# Allegro board ROHM_SENSORSHLD1-EVK-101_BRD_REV01_2016-03-24.brd
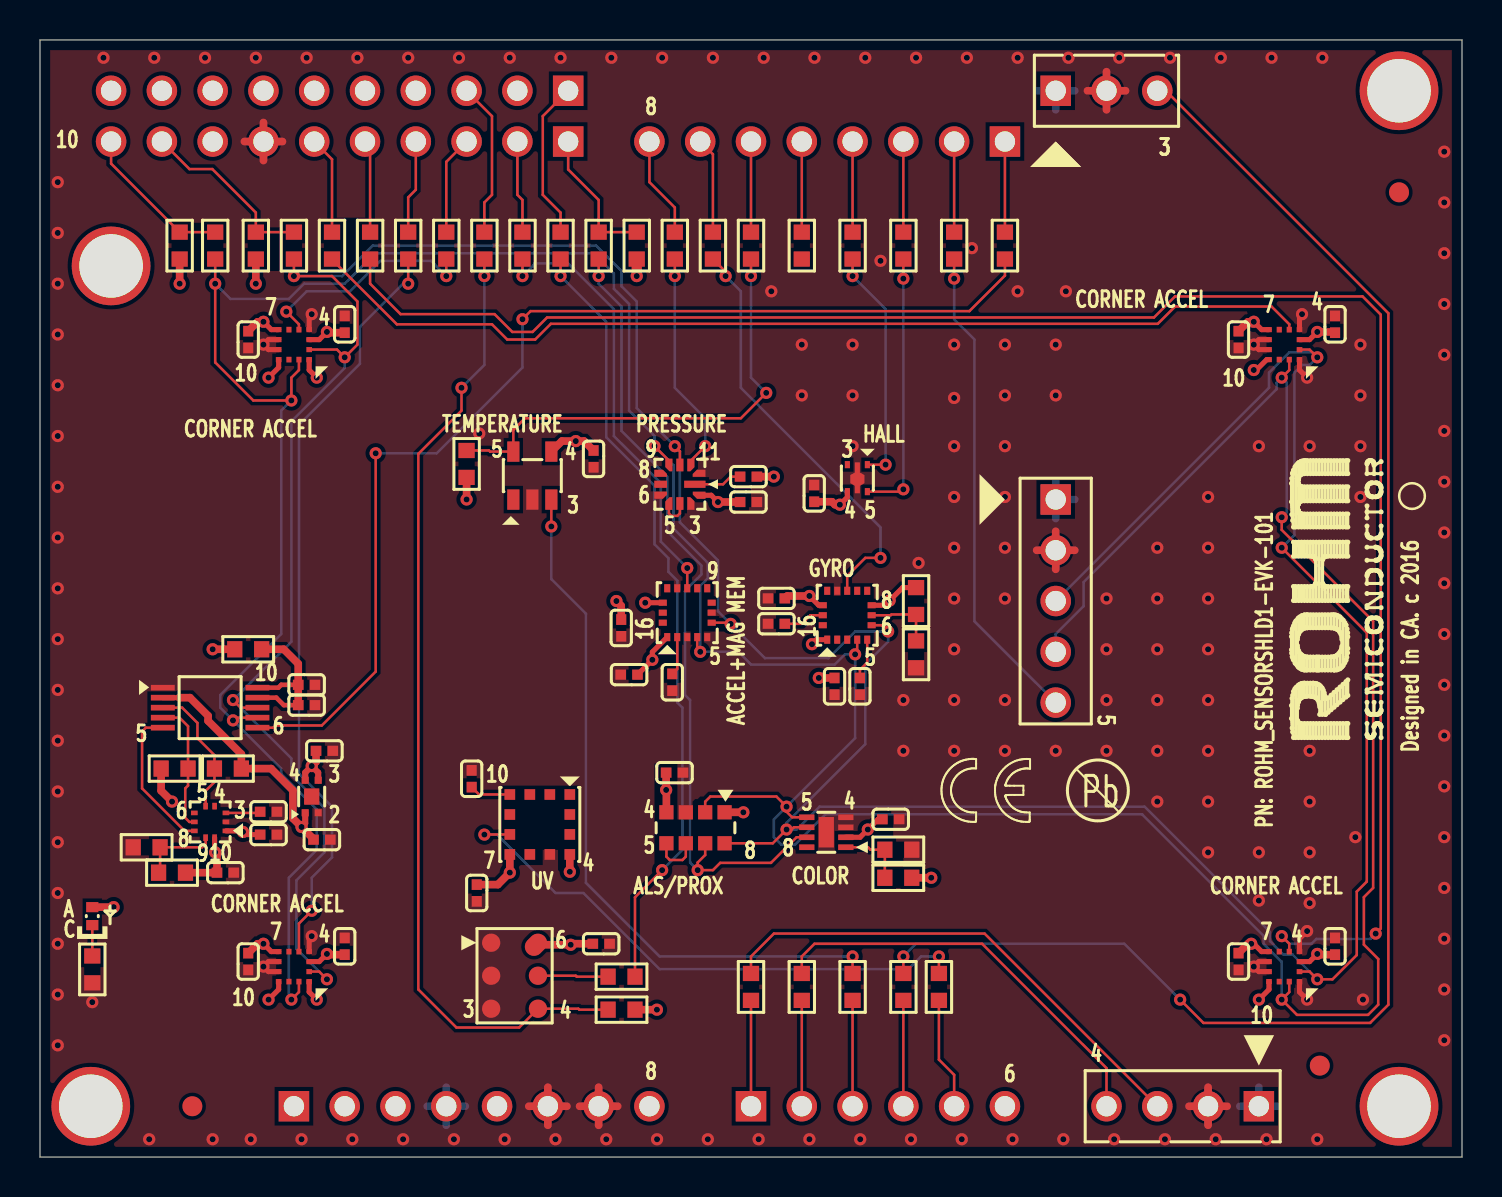
[diagram p0: board, top side]
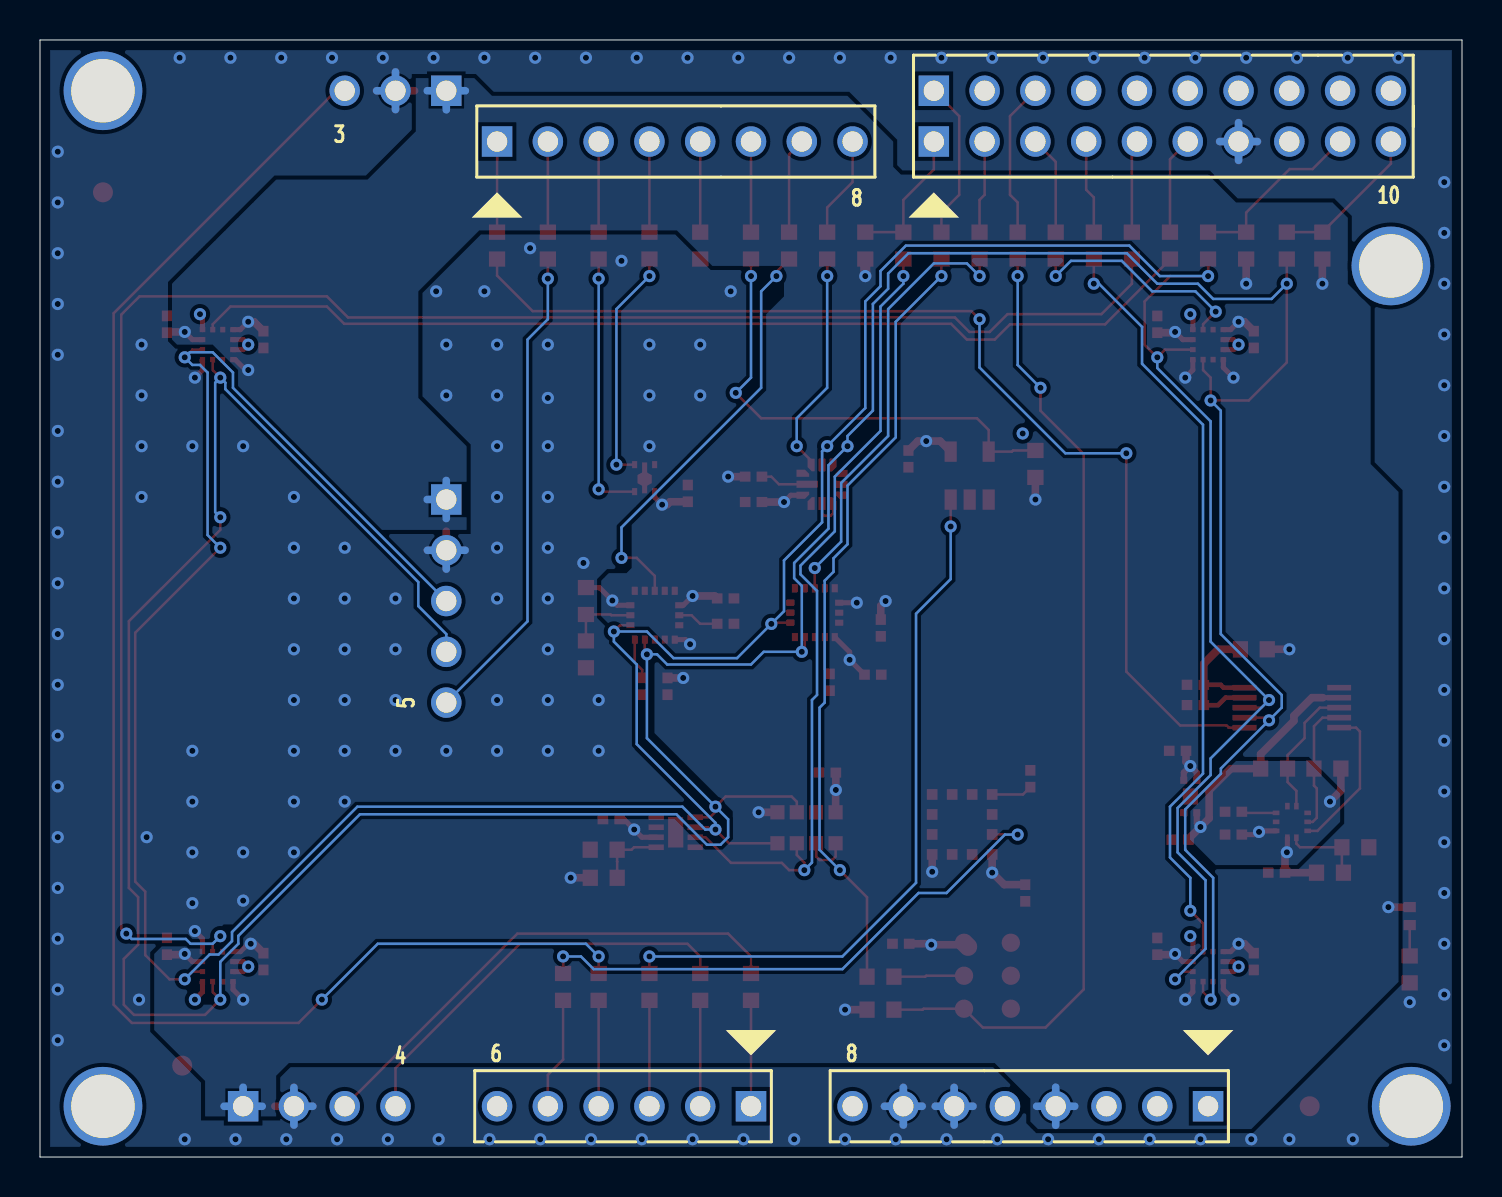
[diagram p1: board, bottom side, seen from below]

Outline 71.12 x 55.88 mm; copper layers: TOP, BOTTOM. Coordinates in mm from the lower left corner of the outline.
Outline path: 0,0 0,55.88 71.12,55.88 71.12,0 0,0

## Placement (name value [footprint] x y rotation side)
C1  0.1uF  [C0402]  27.69 34.92 270 top
C2  0.1uF  [C0402]  35.43 34.04 180 top
C3  0.1uF  [C0402]  35.43 32.77 0 top
C5  0.1uF  [C0402]  38.72 33.2 90 top
C6  0.1uF  [C0402]  21.84 13.21 270 top
C7  1nF  [C0402]  21.59 18.92 90 top
C8  0.47uF  [C0402]  31.74 19.23 0 top
C9  0.1uF  [C0402]  42.55 16.9 0 top
C10  0.1uF  [C0402]  29.46 24.13 180 top
C11  0.1uF  [C0402]  29.07 26.47 270 top
C12  1uF  [C0402]  31.62 23.75 270 top
C17  0.1uF  [C0402]  39.74 23.55 90 top
C19  2.2nF  [C0402]  36.83 26.68 180 top
C21  0.1uF  [C0402]  36.83 27.95 180 top
C22  10nF  [C0402]  41.01 23.55 90 top
C23  0.1uF  [C0402]  28.07 10.67 180 top
C24  0.1uF  [C0402]  15.24 41.66 90 top
C25  0.1uF  [C0402]  10.41 40.89 90 top
C26  0.1uF  [C0402]  15.24 10.54 90 top
C27  0.1uF  [C0402]  10.41 9.78 90 top
C28  0.1uF  [C0402]  64.77 10.54 90 top
C29  0.1uF  [C0402]  59.94 9.78 90 top
C30  0.1uF  [C0402]  64.77 41.66 90 top
C31  0.1uF  [C0402]  59.94 40.89 90 top
C32  1uF  [C0402]  11.43 16.13 180 top
C33  1uF  [C0402]  9.27 14.22 180 top
C34  1uF  [C0402]  11.43 17.27 180 top
C35  1uF  [C0402]  14.22 20.32 180 top
C36  1uF  [C0402]  13.34 23.62 0 top
C37  1uF  [C0402]  14.1 15.88 180 top
C38  1uF  [C0402]  13.34 22.61 180 top
D1  SML-P11VTT86  [LED0402]  2.62 12.05 90 top
H1  BreakoutHeader_5Pin  [HDR_THVT_1X5_100]  50.8 32.89 270 top
H2  BreakoutHeader_4Pin  [HDR_THVT_1X4_100]  60.96 2.54 180 top
H3  BreakoutHeader_3Pin  [HDR_THVT_1X3_100]  50.8 53.34 0 top
H4  Header_Ard_Power  [HDR_THVT_1X8_100]  12.7 2.54 0 bottom
H5  Header_Ard_AnalogIn  [HDR_THVT_1X6_100]  35.56 2.54 0 bottom
H6  Header_Ard_Digital1  [HDR_THVT_1X8_100]  48.26 50.8 180 bottom
H7  Header_Ard_Digital2  [HDR_THVT_1X10_100]  26.42 50.8 180 bottom
H8  Header_Ard_Digital2_TopSide  [HDR_THVT_1X10_100]  26.42 53.34 180 bottom
NOREF  -  [unnamed]  67.97 2.54 0 top
NOREF#2  -  [#2]  27.43 51.56 90 top
NOREF#3  -  [#2]  71.12 0 90 top
NOREF#4  -  [#2]  3.56 53.34 0 top
NOREF#5  -  [#2]  45.72 50.8 0 top
NOREF#6  -  [unnamed#3]  64.01 4.57 90 top
NOREF#7  -  [#2]  -29.69 -36.65 0 top
NOREF#8  -  [unnamed#3]  7.62 2.54 90 top
NOREF#9  -  [#2]  0 55.88 0 top
NOREF#10  -  [unnamed]  2.54 2.54 0 top
NOREF#11  -  [#2]  12.7 2.54 0 top
NOREF#12  -  [unnamed]  67.97 53.34 0 top
NOREF#13  -  [unnamed#3]  67.97 48.26 90 top
NOREF#14  -  [#2]  2.44 51.56 0 top
NOREF#15  -  [#2]  23.88 53.34 0 top
NOREF#16  -  [unnamed]  3.56 44.58 0 top
NOREF#17  -  [#2]  23.88 50.8 0 top
NOREF#18  -  [#2]  3.56 50.8 0 top
NOREF#19  -  [#2]  30.48 50.8 0 top
NOREF#20  -  [#2]  12.7 2.54 0 top
NOREF#21  -  [#2]  -131.17 -237.11 0 top
R1  10k  [R0603]  21.34 34.67 90 top
R8  10k  [R0603]  10.79 45.59 270 top
R9  10k  [R0603]  6.99 45.59 270 top
R10  10k  [R0603]  29.84 45.59 270 top
R11  0  [R0603]  8.76 45.59 270 top
R12  0  [R0603]  12.7 45.59 270 top
R13  0  [R0603]  14.61 45.59 270 top
R14  0  [R0603]  16.51 45.59 270 top
R15  0  [R0603]  18.41 45.59 270 top
R16  0  [R0603]  20.32 45.59 270 top
R17  0  [R0603]  24.13 45.59 270 top
R18  0  [R0603]  27.94 45.59 270 top
R19  0  [R0603]  31.75 45.59 270 top
R20  0  [R0603]  33.66 45.59 270 top
R21  0  [R0603]  35.56 45.59 270 top
R22  0  [R0603]  38.1 45.59 270 top
R23  0  [R0603]  40.64 45.59 270 top
R24  0  [R0603]  43.18 45.59 270 top
R25  0  [R0603]  45.72 45.59 270 top
R26  0  [R0603]  48.26 45.59 270 top
R27  0  [R0603]  35.56 8.51 90 top
R28  0  [R0603]  38.1 8.51 90 top
R29  0  [R0603]  40.64 8.51 90 top
R30  0  [R0603]  43.18 8.51 90 top
R31  0  [R0603]  44.96 8.51 90 top
R33  0  [R0603]  26.04 45.59 90 top
R34  10k  [R0603]  43.81 25.15 90 top
R35  22  [R0603]  29.09 9.02 0 top
R36  10k  [R0603]  2.62 9.38 270 top
R37  10k  [R0603]  42.93 15.37 0 top
R38  10k  [R0603]  29.09 7.37 180 top
R39  0  [R0603]  22.23 45.59 90 top
R40  0  [R0603]  42.93 13.97 180 top
R41  0  [R0603]  43.81 27.81 270 top
R42  200k  [R0603]  10.41 25.4 180 top
R43  10k  [R0603]  9.4 19.43 180 top
R44  0  [R0603]  6.6 14.22 0 top
R45  10k  [R0603]  5.33 15.49 0 top
R46  10k  [R0603]  6.73 19.43 0 top
U1  BDE0600G  [SSOP5]  24.62 34.09 180 top
U2  -  [BM1383GLV]  32 33.66 270 top
U4  BU52014HFV  [HVSOF5]  40.88 33.96 0 top
U5  ML8511  [TQFN12]  25 16.64 180 top
U6  RPR-0521  [IC_3P94X2P36]  32.78 16.47 180 top
U7  -  [BH1745NUC]  39.33 16.25 90 top
U8  KMX62  [LGA_3X3X0P9]  32.37 27.23 0 top
U11  KXG03  [LGA_3X3X0P9]  40.37 27.1 0 top
U12  SPM0423HD4H-WB  [IC_4P72X3P76]  23.74 9.07 0 top
U13  KX122  [LGA_2X2X0P9]  12.7 40.64 180 top
U14  KX122  [LGA_2X2X0P9]  12.7 9.53 180 top
U15  KX122  [LGA_2X2X0P9]  62.23 9.53 180 top
U16  KX122  [LGA_2X2X0P9]  62.23 40.64 180 top
U17  BM1422GMV  [MLLGA010V020A]  8.51 16.76 180 top
U18  NVT2003DP,118  [TSSOP10]  8.51 22.48 0 top
U19  BU18TA2WNVX-TR  [4SSON-EP]  13.59 18.03 90 top

## Library data of the parts
C1-C3 C5-C12 C17 C19 C21-C38 = C_2
D1 = LED_0
H1 = BreakoutHeader_5Pin
H2 = BreakoutHeader_4Pin
H3 = BreakoutHeader_3Pin
H4 = Header_Ard_Power_0
H5 = Header_Ard_AnalogIn
H6 = Header_Ard_Digital1_0
H7 = Header_Ard_Digital2
H8 = Header_Ard_Digital2_TopSide
R1 R8-R31 R33-R46 = R
U1 = HVSOF5_3
U2 = BM1383GLV
U4 = HVSOF5_1
U5 = C-TQFN12-4.0x3.7-1_5.00
U6 = RPR-0521_0
U7 = BH1745NUC_1
U8 = LGA_3.9
U11 = KXG03
U12 = SPM0423HD4H-WB
U13-U16 = KX122
U17 = BM1422GMV
U18 = NVT2003DP,118
U19 = BU18TA2WNVX-TR

## Footprints (pads in the part's own frame, mm; a bottom-side part is the same pattern mirrored in y, then rotated)
4SSON-EP
  rect 0.813x0.762 smd: (0,0)
  rect 0.356x0.356 smd: 1(-0.812,0.325) 2(-0.812,-0.325) 3(0.812,-0.325) 4(0.812,0.325)
BH1745NUC
  rect 0.279x0.762 smd: 1(-0.75,-0.977) 2(-0.25,-0.977) 3(0.25,-0.977) 4(0.75,-0.977) 5(0.75,0.977) 6(0.25,0.977) 7(-0.25,0.977) 8(-0.75,0.977)
  rect 1.524x0.762 smd: 9(0,0)
BM1383GLV
  rect 0.356x1.067 smd: 1(0,0.747)
  custom 0.356x0.635 smd: 2(0.55,0.963) 6(0.55,-0.963) 8(-0.55,-0.963) 12(-0.55,0.963)
  custom 0.635x0.356 smd: 3(0.963,0.55) 5(0.963,-0.55) 9(-0.963,-0.55) 11(-0.963,0.55)
  rect 0.635x0.356 smd: 4(0.963,0) 10(-0.963,0)
  rect 0.356x0.635 smd: 7(0,-0.963)
C0402
  rect 0.533x0.508 smd: 1(-0.419,0) 2(0.419,0)
HDR_THVT_1X3_100
  rect 1.524x1.524 hole 1.016: 1(0,0)
  round 1.524 hole 1.016: 2(2.54,0) 3(5.08,0)
HDR_THVT_1X4_100
  rect 1.524x1.524 hole 1.016: 1(0,0)
  round 1.524 hole 1.016: 2(2.54,0) 3(5.08,0) 4(7.62,0)
HDR_THVT_1X5_100
  rect 1.524x1.524 hole 1.016: 1(0,0)
  round 1.524 hole 1.016: 2(2.54,0) 3(5.08,0) 4(7.62,0) 5(10.16,0)
HDR_THVT_1X6_100
  rect 1.524x1.524 hole 1.016: 1(0,0)
  round 1.524 hole 1.016: 2(2.54,0) 3(5.08,0) 4(7.62,0) 5(10.16,0) 6(12.7,0)
HDR_THVT_1X8_100
  rect 1.524x1.524 hole 1.016: 1(0,0)
  round 1.524 hole 1.016: 2(2.54,0) 3(5.08,0) 4(7.62,0) 5(10.16,0) 6(12.7,0) 7(15.24,0) 8(17.78,0)
HDR_THVT_1X10_100
  rect 1.524x1.524 hole 1.016: 1(0,0)
  round 1.524 hole 1.016: 2(2.54,0) 3(5.08,0) 4(7.62,0) 5(10.16,0) 6(12.7,0) 7(15.24,0) 8(17.78,0) 9(20.32,0) 10(22.86,0)
HVSOF5
  rect 0.254x0.356 smd: 1(0.5,0.675) 3(-0.5,0.675) 4(-0.5,-0.675) 5(0.5,-0.675)
  custom 0.711x1.549 smd: 2(0,0.015)
IC_3P94X2P36
  rect 0.711x0.711 smd: 1(-1.455,-0.775) 2(-0.485,-0.775) 3(0.485,-0.775) 4(1.455,-0.775) 5(1.455,0.775) 6(0.485,0.775) 7(-0.485,0.775) 8(-1.455,0.775)
IC_4P72X3P76
  round 0.914 smd: 1(-1.17,1.65) 2(-1.17,0) 3(-1.17,-1.65) 4(1.17,-1.65) 5(1.17,0)
  oval 1.194x0.914 smd rot 45: 6(1.07,1.55)
LED0402
  rect 0.508x0.61 smd: A(0.45,0) C(-0.45,0)
LGA_2X2X0P9
  rect 0.279x0.254 smd: 1(-0.763,0.75) 2(-0.763,0.25) 3(-0.763,-0.25) 4(-0.763,-0.75) 7(0.763,-0.75) 8(0.763,-0.25) 9(0.763,0.25) 10(0.763,0.75)
  rect 0.254x0.279 smd: 5(-0.25,-0.75) 6(0.25,-0.75) 11(0.25,0.75) 12(-0.25,0.75)
LGA_3X3X0P9
  rect 0.305x0.406 smd: 1(-1,-1.222) 2(-0.5,-1.222) 3(0,-1.222) 4(0.5,-1.222) 5(1,-1.222) 9(1,1.222) 10(0.5,1.222) 11(0,1.222) 12(-0.5,1.222) 13(-1,1.222)
  rect 0.406x0.305 smd: 6(1.222,-0.5) 7(1.222,0) 8(1.222,0.5) 14(-1.222,0.5) 15(-1.222,0) 16(-1.222,-0.5)
MLLGA010V020A
  rect 0.33x0.229 smd: 1(-0.79,0.45) 2(-0.79,0) 3(-0.79,-0.45) 6(0.79,-0.45) 7(0.79,0) 8(0.79,0.45)
  rect 0.229x0.33 smd: 4(-0.225,-0.79) 5(0.225,-0.79) 9(0.225,0.79) 10(-0.225,0.79)
R0603
  rect 0.762x0.813 smd: 1(-0.673,0) 2(0.673,0)
SSOP5
  rect 0.61x1.016 smd: 1(0.95,1.2) 2(0,1.2) 3(-0.95,1.2) 4(-0.95,-1.2) 5(0.95,-1.2)
TQFN12
  rect 0.533x0.533 smd: 1(-1.5,-1.5) 2(-1.5,-0.5) 3(-1.5,0.5) 4(-1.5,1.5) 5(-0.5,1.5) 6(0.5,1.5) 7(1.5,1.5) 8(1.5,0.5) 9(1.5,-0.5) 10(1.5,-1.5) 11(0.5,-1.5) 12(-0.5,-1.5)
TSSOP10
  rect 1.194x0.279 smd: 1(-2.366,1) 2(-2.366,0.5) 3(-2.366,0) 4(-2.366,-0.5) 5(-2.366,-1) 6(2.366,-1) 7(2.366,-0.5) 8(2.366,0) 9(2.366,0.5) 10(2.366,1)
unnamed
  round 3.937 hole 3.175: (0,0)
unnamed#3
  round 1 smd: 1(0,0)

## Nets
1.8V: C32.2 C33.2 C37.2 R43.1 R44.2 R46.1 U17.1(AVDD) U17.10(DVDD) U18.2(VREFA) U19.1(VOUT)
GND: C1.2 C3.2 C5.2 C6.2 C7.2 C8.2 C9.2 C10.2 C11.2 C12.2 C17.1 C19.2 C21.2 C22.1 C23.1 C24.2 C25.1 C26.2 C27.1 C28.2 C29.1 C30.2 C31.1 C32.1 C33.1 C34.1 C35.1 C36.2 C37.1 C38.1 H1.2(GND) H2.2(GND) H3.2(GND) H4.6(GND) H4.7(GND1) H7.7(GND) R34.1 R36.2 R37.2 R45.1 U1.2(GND) U2.3(VSS) U2.6(TEST1) U2.12(TEST0) U4.2(GND) U5.5(GND) U6.3(GND) U7.3(GND) U7.4(TEST) U7.9(TD) U8.3(GND#3) U8.5(GND#5) U8.7(ADDR) U8.12(GND#12) U11.12(VSS) U12.1(GND0) U12.2(SEL) U12.3(GND1) U13.4(TRIG) U13.8(GND0) U13.9(GND1) U14.4(TRIG) U14.8(GND0) U14.9(GND1) U15.1(ADDR) U15.4(TRIG) U15.8(GND0) U15.9(GND1) U16.1(ADDR) U16.4(TRIG) U16.8(GND0) U16.9(GND1) U17.2(GND) U18.1(GND) U19.2(GND)
VDD: C1.1 C2.1 C3.1 C5.1 C6.1 C8.1 C9.1 C10.1 C11.1 C17.2 C21.1 C23.2 C24.1 C25.2 C26.1 C27.2 C28.1 C29.2 C30.1 C31.2 C35.2 D1.A(ANODE) H1.1(VDD) H2.1(VDD) H3.1(VDD) H4.4(3.3V) R1.1 R8.2 R9.2 R10.2 R38.1 R40.1 R41.1 R42.2 U1.4(VDD) U2.2(VDD) U4.4(VDD) U5.4(EN) U5.7(VDD) U6.1(VDD) U6.4(LEDA) U7.2(VCC) U8.1(VDDIO) U8.14(VDD) U11.1(VDDIO) U11.8(CS_B) U11.14(VDD) U12.6(VDD) U13.1(ADDR) U13.3(IO_VDD) U13.7(VDD) U13.10(NCS) U14.1(ADDR) U14.3(IO_VDD) U14.7(VDD) U14.10(NCS) U15.3(IO_VDD) U15.7(VDD) U15.10(NCS) U16.3(IO_VDD) U16.7(VDD) U16.10(NCS) U19.3(STBY) U19.4(VIN)
ADC0: R29.2 U1.3(VTEMP)
ADC1: R31.2 U5.8(OUT)
DMIC_CLK: R38.2 R39.1 U12.4(CLK)
DMIC_DATA: R33.1 R35.2
EXP_ADC1: H2.3(ADC0) R27.2
EXP_ADC2: H2.4(ADC1) R28.2
EXP_ADC3: H3.3(ADC) R30.2
EXP_GPIO1: H1.5(INT) R25.2
GPIO0: R24.2 U4.5(OUT1)
GPIO1: R23.2 U4.1(OUT2)
GPIO2: R22.2
GPIO3: R1.2 R21.2 U1.5(OS)
INT_BM1383: R19.2 U2.11(INT)
INT_KMX62: R17.2 U8.11(INT1)
INT_KX122-1: R16.2 U13.5(INT1)
INT_KX122-2: R14.2 U15.5(INT1)
INT_KX122-3: R15.2 U14.5(INT1)
INT_KX122-4: R13.2 U16.5(INT1)
INT_KXG03: R20.2 U11.11(INT1)
INT_MAG: R26.2 U18.6(B3)
INT_OPTICAL: R18.2 U6.7(INT) U7.7(INT)
SCL: H1.4(SCL) R11.2 U2.9(SCL) U6.2(SCL) U7.5(SCL) U8.4(SCL) U11.4(SCLK_SCL) U13.12(SCL) U14.12(SCL) U15.12(SCL) U16.12(SCL) U18.7(B2)
SDA: H1.3(SDA) R12.2 U2.10(SDA) U6.8(SDA) U7.6(SDA) U8.6(SDA) U11.6(MOSI_SDA) U13.2(SDA) U14.2(SDA) U15.2(SDA) U16.2(SDA) U18.8(B1)
N14002690: C12.1 U8.2(CAP)
N14009218: C7.1 U5.10(TR)
N14013380: U6.5(LEDK) U6.6(LDR)
N14046481: R37.1 R40.2 U7.1(ADDR)
N14046877: U2.4(TIN) U2.5(TOUT)
N14048054: C2.2 U2.1(DREG)
N14098075: H6.8 R19.1
N14098079: H6.7 R20.1
N14098086: H6.6 R21.1
N14098098: H6.5 R22.1
N14098110: H6.4 R23.1
N14098122: H6.3 R24.1
N14098134: H6.2(2/TX) R25.1
N14098146: H6.1(1/RX) R26.1
N14098493: H5.1(A0) R27.1
N14098497: H5.2(A1) R28.1
N14098504: H5.3(A2) R29.1
N14098516: H5.4(A3) R30.1
N14098528: H5.5(A4) R31.1
N14105342: C19.1 U11.15(CPOUT)
N14105886: C22.2 U11.5(VCO_CP)
N14107068: R34.2 R41.2 U11.7(MISO_ADDR)
N14122965: H8.3(DMIC_CLK) R39.2
N14126545: R35.1 U12.5(DATA)
N14207646: C34.2 U17.3(VREG)
N14208918: R46.2 U17.7(SCL) U18.4(A2)
N14209514: U17.8(DRDY) U18.5(A3)
N14210198: R44.1 R45.2 U17.9(ADDR)
N14210289: R43.2 U17.5(SDA) U18.3(A1)
N14216212: C36.1 C38.2 R42.1 U18.9(VREFB) U18.10(EN)
N14227165: H7.1(8) R10.1 R18.1
N14227297: H7.10(SCL) R9.1 R11.1
N14227301: H7.9(SDA) R8.1 R12.1
N14227313: H7.5(12) R14.1
N14227321: H7.4(11) R15.1
N14227333: H7.3(10) R16.1
N14227345: H7.2(9) R17.1
N14227481: H7.6(13) R13.1
N141214550: H8.1(DMIC_DATA) R33.2
N142279790: D1.C(CATHODE) R36.1

Pads without a net: H4 1 2 3 5 8; H5 6; H7 8; H8 2 4 5 6 7 8 9 10; NOREF#6 1; NOREF#8 1; NOREF#13 1; U1 1; U2 7 8; U4 3; U5 1 2 3 6 9 11 12; U7 8; U8 8 9 10 13 15 16; U11 2 3 9 10 13 16; U13 6 11; U14 6 11; U15 6 11; U16 6 11; U17 4 6

## Via types
v1: diameter 0.61, hole 0.305, TOP to BOTTOM, 261 vias

## Routing (per net, layer and track width the routed paths; a pad name or vN(x,y) marks a point on that pad's centre or on a via; arc(x,y) is an arc through that point)
1.8V: length 19.7
  TOP w0.254: U17.1 10.1,16.31 v1(10.15,16.26) 10.29,16.13 C32.2 ; v1(8.76,15.24) 8.73,15.27 U17.10 ; 6.96,22.98 U18.2
  TOP w0.305: U19.1 13.26,16.69 v1(13.08,16.51)
  TOP w0.381: 6.96,22.98 7.5,22.98 8.41,22.07 8.41,21.82 10.07,20.15 R43.1 11.56,19.43 12.65,18.34 12.65,16.94 v1(13.08,16.51) 13.68,15.91 C37.2 ; R46.1 6.06,18.33 v1(6.6,17.78) ; R44.2 C33.2 8.85,15.15 v1(8.76,15.24)
GND: length 55.3
  TOP w0.254: U15.9 60.96,9.27 v1(60.71,9.53) 60.96,9.78 U15.8 ; v1(63.12,42.16) 62.99,42.04 U16.4 ; U15.1 62.99,8.25 v1(63.37,7.87) ; U13.4 13.46,42.04 v1(13.59,42.16) ; U13.8 11.43,40.89 v1(11.18,40.64) 11.43,40.39 U13.9 ; v1(13.59,11.05) 13.46,10.92 U14.4 ; U16.9 60.96,40.39 v1(60.71,40.64) 60.96,40.89 U16.8 ; v1(63.37,11.3) 62.99,10.92 U15.4 ; U14.8 11.43,9.78 v1(11.18,9.53) 11.43,9.27 U14.9 ; U16.1 62.99,39.37 v1(63.37,38.99)
  TOP w0.381: H7.7 12.13,50.8 ; H7.7 11.18,49.85 ; H7.7 11.18,51.75 ; H7.7 10.22,50.8 ; H3.2 53.34,54.29 ; H3.2 53.34,52.39 ; H3.2 52.39,53.34 ; H3.2 54.29,53.34 ; H1.2 50.8,31.31 ; H1.2 49.85,30.35 ; H1.2 50.8,29.4 ; H1.2 51.75,30.35 ; 25.4,1.59 H4.6 ; H4.6 26.35,2.54 ; H4.6 25.4,3.49 ; H4.6 24.45,2.54 ; 57.47,2.54 H2.2 ; H2.2 58.42,1.59 ; H2.2 59.37,2.54 ; H2.2 58.42,3.49 ; 27.94,1.59 H4.7 ; H4.7 26.99,2.54 ; H4.7 28.89,2.54 ; H4.7 27.94,3.49
  BOTTOM w0.381: 27.94,1.6 H4.7 ; H4.7 27,2.54 ; H4.7 27.94,3.48 ; H4.7 28.88,2.54 ; 58.42,1.6 H2.2 ; H2.2 58.42,3.48 ; H2.2 57.48,2.54 ; 53.34,52.4 H3.2 ; H3.2 53.34,54.28 ; H3.2 54.28,53.34 ; H1.2 51.74,30.35 ; H1.2 49.86,30.35 ; H1.2 50.8,29.41 ; H4.6 26.34,2.54 ; H4.6 24.46,2.54 ; H4.6 25.4,1.6 ; H4.6 25.4,3.48 ; 10.24,50.8 H7.7 ; H7.7 12.12,50.8 ; H7.7 11.18,51.74 ; H7.7 11.18,49.86
  vias: v1(0.89,48.77) v1(0.89,46.23) v1(0.89,43.69) v1(0.89,41.15) v1(0.89,38.61) v1(0.89,36.07) v1(0.89,33.53) v1(0.89,30.99) v1(0.89,28.45) v1(0.89,25.91) v1(0.89,23.37) v1(0.89,20.83) v1(0.89,18.29) v1(0.89,15.75) v1(0.89,13.21) v1(0.89,10.67) v1(0.89,8.13) v1(0.89,5.59) v1(2.62,7.75) v1(3.17,54.99) v1(5.46,0.89) v1(5.71,54.99) v1(8.26,54.99) v1(8.64,0.89) v1(10.54,0.89) v1(10.79,54.99) v1(13.08,0.89) v1(13.34,54.99) v1(15.62,0.89) v1(15.88,54.99) v1(18.16,0.89) v1(18.41,54.99) v1(20.7,0.89) v1(20.95,54.99) v1(21.97,36.2) v1(23.24,0.89) v1(23.5,54.99) v1(25.78,0.89) v1(26.04,54.99) v1(28.32,0.89) v1(28.57,54.99) v1(30.86,0.89) v1(31.11,54.99) v1(33.4,0.89) v1(33.66,54.99) v1(35.94,0.89) v1(36.2,54.99) v1(36.58,43.31) v1(38.1,40.64) v1(38.1,38.1) v1(38.48,0.89) v1(38.73,54.99) v1(40.64,40.64) v1(40.64,38.1) v1(40.64,35.56) v1(41.02,0.89) v1(41.27,54.99) v1(42.04,44.83) v1(43.18,22.86) v1(43.18,20.32) v1(43.56,0.89) v1(43.81,54.99) v1(43.94,29.72) v1(45.72,40.64) v1(45.72,37.97) v1(45.72,35.56) v1(45.72,33.02) v1(45.72,30.48) v1(45.72,27.94) v1(45.72,25.4) v1(45.72,22.86) v1(45.72,20.32) v1(46.1,0.89) v1(46.35,54.99) v1(46.61,45.47) v1(48.26,40.64) v1(48.26,38.1) v1(48.26,35.56) v1(48.26,33.02) v1(48.26,30.48) v1(48.26,27.94) v1(48.26,22.86) v1(48.26,20.32) v1(48.64,0.89) v1(48.9,54.99) v1(48.9,43.31) v1(50.8,40.64) v1(50.8,38.1) v1(50.8,20.32) v1(51.18,0.89) v1(51.31,43.31) v1(51.44,54.99) v1(53.34,27.94) v1(53.34,25.4) v1(53.34,22.86) v1(53.34,20.32) v1(53.72,0.89) v1(53.98,54.99) v1(55.88,30.48) v1(55.88,27.94) v1(55.88,25.4) v1(55.88,22.86) v1(55.88,20.32) v1(55.88,17.78) v1(56.26,0.89) v1(56.52,54.99) v1(58.42,33.02) v1(58.42,30.48) v1(58.42,27.94) v1(58.42,25.4) v1(58.42,22.86) v1(58.42,20.32) v1(58.42,17.78) v1(58.42,15.24) v1(58.8,0.89) v1(59.05,54.99) v1(60.96,35.56) v1(60.96,15.24) v1(60.96,12.83) v1(61.34,0.89) v1(61.59,54.99) v1(63.5,35.56) v1(63.5,20.32) v1(63.5,17.78) v1(63.5,15.24) v1(63.5,12.7) v1(63.88,0.89) v1(64.14,54.99) v1(65.79,16) v1(66.04,40.64) v1(66.04,38.1) v1(66.04,35.56) v1(66.04,33.02) v1(66.17,7.87) v1(70.23,50.29) v1(70.23,47.75) v1(70.23,45.21) v1(70.23,42.67) v1(70.23,40.13) v1(70.23,36.32) v1(70.23,33.78) v1(70.23,31.24) v1(70.23,28.7) v1(70.23,26.16) v1(70.23,23.62) v1(70.23,21.08) v1(70.23,18.54) v1(70.23,16) v1(70.23,13.46) v1(70.23,10.92) v1(70.23,8.38) v1(70.23,5.84)
VDD: length 75.5
  TOP w0.254: v1(38.48,28.07) 38.95,27.6 U11.14 ; C10.1 v1(30.63,24.87) 30.63,25.26 U8.1 ; U16.3 63.5,40.89 v1(63.88,41.27) ; U13.10 11.94,39.5 v1(11.43,38.99) ; U14.10 11.94,8.38 v1(11.43,7.87) ; U13.7 11.57,41.39 v1(11.18,41.78) ; U14.1 13.46,8.25 v1(13.84,7.87) ; v1(14.35,10.16) 13.97,9.78 U14.3 ; v1(60.71,41.78) 61.1,41.39 U16.7 ; v1(38.61,25.65) 38.83,25.88 U11.1 ; v1(63.88,10.16) 63.5,9.78 U15.3 ; v1(60.58,10.67) 60.71,10.67 61.1,10.28 U15.7 ; U14.7 11.57,10.28 v1(11.18,10.67) ; R41.1 43.14,28.49 v1(42.49,27.84) 42.26,27.6 U11.8 ; U2.2 33.57,33.1 v1(33.91,32.77) ; v1(13.84,38.99) 13.46,39.37 U13.1 ; U4.4 40.38,33.01 v1(40.01,32.63) ; v1(60.96,7.87) 61.47,8.38 U15.10 ; U8.14 v1(30.27,27.73) ; v1(14.35,41.27) 13.97,40.89 U13.3 ; v1(60.71,39.37) 60.83,39.37 61.35,39.89 U16.10 ; C9.1 41.92,16.9 v1(41.4,16.38) 41.01,16 U7.2
  TOP w0.305: U19.3 13.91,19.23 v1(13.59,19.56) 13.26,19.23 U19.4
  TOP w0.381: C6.1 22.9,13.63 v1(23.5,14.23) U5.7 ; v1(60.71,41.78) 60.41,41.78 C31.2 ; C2.1 v1(36.7,34.04) ; v1(40.01,32.63) 39.76,32.63 39.61,32.78 C5.1 ; v1(63.88,41.27) 64.73,41.27 C30.1 ; C28.1 63.92,10.12 v1(63.88,10.16) ; C26.1 14.39,10.12 v1(14.35,10.16) ; R1.1 v1(21.34,32.89) ; C21.1 37.37,28.07 v1(38.48,28.07) ; C35.2 13.8,19.77 v1(13.59,19.56) ; R38.1 v1(30.86,7.37) ; U12.6 v1(26.54,10.62) 26.6,10.67 C23.2 ; R8.2 v1(10.79,43.69) ; C17.2 v1(38.95,23.97) ; R42.2 v1(8.64,25.4) ; R40.1 v1(44.58,13.97) ; C3.1 v1(33.91,32.77) ; v1(11.18,10.67) 10.88,10.67 C27.2 ; R9.2 v1(6.99,43.69) ; v1(11.18,41.78) 10.88,41.78 C25.2 ; C1.1 27.22,35.81 v1(26.8,35.81) 26.1,35.81 U1.4 ; C24.1 14.39,41.24 v1(14.35,41.27) ; D1.A v1(3.68,12.5) ; v1(60.58,10.67) 60.41,10.67 C29.2 ; v1(28.83,27.81) 29.07,27.57 C11.1 ; C8.1 v1(31.32,18.36) 31.33,18.35 U6.4 ; U5.4 v1(26.5,14.27) ; U6.1 v1(35.18,17.24)
  TOP w0.508: v1(29.84,44.07) R10.2
  BOTTOM w0.381: H2.1 61.91,2.54 ; H2.1 60.01,2.54 ; H2.1 60.96,3.49 ; 50.8,31.94 H1.1 ; H1.1 51.75,32.89 ; H1.1 50.8,33.85 ; 19.37,2.54 H4.4 ; H4.4 20.32,1.59 ; H4.4 21.27,2.54 ; H4.4 20.32,3.49 ; H3.1 51.75,53.34 ; H3.1 50.8,52.39 ; H3.1 49.85,53.34
ADC0: length 35.6
  TOP w0.127: R29.2 v1(40.64,10.03) ; U1.3 v1(25.57,31.54)
  BOTTOM w0.127: v1(25.57,31.54) 25.57,28.91 27.3,27.18 27.3,13.72 30.99,10.03 v1(40.64,10.03)
ADC1: length 27.9
  TOP w0.127: v1(22.23,16.13) 22.23,16.14 U5.8 ; R31.2 v1(44.96,10.03)
  BOTTOM w0.127: v1(44.96,10.03) 44.06,10.03 43.43,9.4 30.99,9.4 27.18,13.21 25.78,13.21 22.86,16.13 v1(22.23,16.13)
DMIC_CLK: length 48.6
  TOP w0.127: v1(21.08,38.48) 21.08,37.34 18.92,35.18 18.92,8.38 20.83,6.48 23.96,6.48 U12.4 26.92,7.42 26.97,7.37 R38.2 ; R39.1 v1(22.23,44.07)
  BOTTOM w0.127: v1(22.23,44.07) 22.23,39.62 v1(21.08,38.48)
DMIC_DATA: length 39.4
  TOP w0.127: R33.1 v1(26.04,44.07) ; R35.2 29.76,12.99 v1(31.11,14.35)
  BOTTOM w0.127: v1(31.11,14.35) 32.13,15.37 32.13,22.48 31.88,22.73 31.88,28.83 31.43,29.27 31.43,29.95 30.73,30.65 30.73,33.59 28.32,36 28.32,41.78 v1(26.04,44.07)
EXP_ADC1: length 25.2
  TOP w0.127: H2.3 47.24,11.18 36.7,11.18 35.56,10.03 R27.2
EXP_ADC2: length 20.8
  TOP w0.127: R28.2 38.1,10.03 38.73,10.67 47.12,10.67 53.34,4.45 H2.4
EXP_ADC3: length 78.1
  TOP w0.127: R30.2 v1(43.18,10.03) ; H3.3 56.31,53.34 67.44,42.21 67.44,7.62 66.53,6.71 58.19,6.71 v1(57.02,7.87)
  BOTTOM w0.127: v1(43.18,10.03) 43.81,10.67 54.23,10.67 v1(57.02,7.87)
EXP_GPIO1: length 24.3
  TOP w0.127: R25.2 v1(45.72,43.94)
  BOTTOM w0.127: H1.5 46.74,26.8 46.74,40.89 45.72,41.91 v1(45.72,43.94)
GPIO0: length 13.4
  TOP w0.127: v1(43.18,33.4) 43.18,33.41 43.05,33.29 U4.5 ; R24.2 v1(43.18,43.94)
  BOTTOM w0.127: v1(43.18,43.94) v1(43.18,33.4)
GPIO1: length 11.9
  TOP w0.127: U4.1 v1(42.29,34.64) ; R23.2 v1(40.64,44.07)
  BOTTOM w0.127: v1(40.64,44.07) 42.29,42.42 v1(42.29,34.64)
GPIO3: length 23.9
  TOP w0.127: R21.2 v1(35.56,44.07) ; R1.2 22.46,35.34 22.51,35.29 U1.5 23.67,36.37 24.26,36.96 35.05,36.96 v1(36.32,38.23)
  BOTTOM w0.127: v1(36.32,38.23) 35.56,38.99 v1(35.56,44.07)
INT_BM1383: length 11.2
  TOP w0.127: R19.2 v1(31.75,44.07) ; v1(33.27,35.56) 32.55,34.84 U2.11
  BOTTOM w0.127: v1(31.75,44.07) 31.75,38.48 33.27,36.96 v1(33.27,35.56)
INT_KMX62: length 22.1
  TOP w0.127: U8.11 v1(32.37,29.46) ; R17.2 v1(24.13,44.07)
  BOTTOM w0.127: v1(24.13,44.07) 24.77,44.7 26.42,44.7 28.7,42.42 28.7,36.07 31.05,33.72 31.05,30.78 v1(32.37,29.46)
INT_KX122-1: length 11.4
  TOP w0.127: v1(12.32,42.29) 12.95,41.66 U13.5 ; R16.2 v1(20.32,44.07)
  BOTTOM w0.127: v1(12.32,42.29) 13.34,43.31 15.49,43.31 17.02,44.83 19.56,44.83 v1(20.32,44.07)
INT_KX122-2: length 91
  TOP w0.127: v1(62.1,11.05) 62.48,10.67 U15.5 ; v1(66.8,11.18) 67.06,11.43 67.06,42.14 66.14,43.05 56.77,43.05 55.71,42 25.36,42 24.64,41.27 23.62,41.27 22.73,42.16 18.03,42.16 16.51,43.69 R14.2
  BOTTOM w0.127: v1(66.8,11.18) 66.53,10.91 63.83,10.91 63.59,10.67 62.48,10.67 v1(62.1,11.05)
INT_KX122-3: length 38.4
  TOP w0.127: U14.5 12.95,11.68 v1(13.59,12.32) ; R15.2 v1(18.41,43.69)
  BOTTOM w0.127: v1(18.41,43.69) 18.16,43.69 16,41.53 16,39.68 12.95,36.63 12.95,19.18 14.61,17.53 14.61,14.99 13.59,13.97 v1(13.59,12.32)
INT_KX122-4: length 50.9
  TOP w0.127: U16.5 62.48,41.66 61.59,42.55 56.77,42.55 55.91,41.68 25.55,41.68 24.77,40.89 23.37,40.89 22.61,41.66 17.85,41.66 14.61,44.9 R13.2
INT_KXG03: length 21.2
  TOP w0.127: U11.11 40.37,29.07 41.27,29.97 v1(42.04,29.97) ; R20.2 34.29,44.28 v1(34.29,44.07)
  BOTTOM w0.127: v1(42.04,29.97) 42.04,31.5 35.05,38.48 35.05,43.31 v1(34.29,44.07)
INT_MAG: length 55.4
  TOP w0.127: U18.6 11.67,21.48 11.78,21.59 14.1,21.59 16.79,24.28 v1(16.79,35.2) ; v1(24.13,41.91) 24.54,42.32 46.48,42.32 48.26,44.09 R26.2
  BOTTOM w0.127: v1(24.13,41.91) 24.13,39.5 19.84,35.2 v1(16.79,35.2)
INT_OPTICAL: length 40.9
  TOP w0.127: R18.2 v1(27.94,44.07) ; U6.7 33.27,15.11 32.89,14.73 v1(32.89,14.35) 33.66,14.35 34.02,14.72 36.56,14.72 37.84,16 U7.7
  BOTTOM w0.127: v1(27.94,44.07) 27.94,43.69 29.08,42.55 29.08,36.32 31.37,34.04 31.37,31.3 33.08,29.59 33.08,29.15 32.26,28.32 32.26,23.11 32.51,22.86 32.51,14.73 v1(32.89,14.35)
SCL: length 210.4
  TOP w0.127: v1(9.65,21.84) 9.79,21.98 U18.7 ; U14.12 12.95,8.25 v1(12.57,7.87) ; v1(62.1,32) 62.1,31.37 66.67,26.8 66.67,13.46 66.21,13 66.21,10.62 66.93,9.91 66.93,7.62 66.42,7.11 62.87,7.11 v1(62.1,7.87) 62.48,8.25 U15.12 ; U13.12 12.95,39.37 12.57,38.99 v1(12.57,37.85) 10.67,37.85 8.76,39.75 v1(8.76,43.69) R11.2 ; U2.9 31.45,34.84 v1(30.73,35.56) ; v1(40.77,25.15) 40.87,25.25 U11.4 ; U16.12 62.48,39.37 v1(62.1,38.99) ; U6.2 33.27,17.77 33.53,18.03 36.83,18.03 v1(37.34,17.53) 37.34,17.27 37.61,17 U7.5 ; v1(33.02,25.27) 32.87,25.42 U8.4
  BOTTOM w0.127: H1.4 50.8,26.16 52.2,27.56 52.2,28.76 61.85,38.41 61.85,38.73 v1(62.1,38.99) 62.36,38.73 62.36,32.26 v1(62.1,32) ; v1(12.57,37.85) 12.06,37.34 12.06,26.16 9.02,23.11 9.02,22.48 v1(9.65,21.84) 12.06,19.44 12.06,19.17 13.84,17.39 13.84,15.37 12.45,13.97 12.45,8 v1(12.57,7.87) ; v1(8.76,43.69) 9.53,42.93 12.45,42.93 13.21,43.69 15.24,43.69 16.76,45.21 27.69,45.21 28.7,44.2 28.7,43.43 29.46,42.67 29.46,37.34 30.73,36.07 v1(30.73,35.56) 31.69,34.61 31.69,31.43 33.4,29.72 33.4,28.96 33.02,28.57 v1(33.02,25.27) 34.92,25.27 35.56,24.64 39.75,24.64 40.26,25.15 v1(40.77,25.15) 40.77,20.95 v1(37.34,17.53) 36.7,16.89 36.7,16 37.08,15.62 37.77,15.62 39.29,17.14 55.12,17.14 61.2,11.06 61.2,10.67 62.1,9.77 v1(62.1,7.87)
SDA: length 201.6
  TOP w0.127: R12.2 v1(12.7,44.07) 14.61,44.07 15.88,42.8 15.88,40.64 v1(15.24,40.01) 14.86,40.39 U13.2 ; v1(31.75,35.56) 32,35.31 U2.10 ; v1(14.35,8.89) 13.97,9.27 U14.2 ; U15.2 63.5,9.27 63.5,9.27 v1(63.88,8.89) 64.64,8.89 65.86,10.1 65.86,13.28 66.36,13.78 66.36,26.23 v1(62.1,30.48) ; U8.6 34.48,26.73 v1(34.54,26.67) ; U7.6 37.7,16.5 37.59,16.38 v1(37.34,16.38) 36.65,15.69 U6.8 ; U16.2 63.5,40.39 v1(63.88,40.01) ; U18.8 10.03,22.48 v1(9.65,22.86) ; v1(42.42,26.29) 42.1,26.6 U11.6
  BOTTOM w0.127: v1(12.7,44.07) 15.11,44.07 16.64,45.59 27.81,45.59 29.08,44.32 29.08,43.56 29.84,42.8 29.84,37.47 v1(31.75,35.56) 32,35.31 32,31.75 33.91,29.84 33.91,27.3 v1(34.54,26.67) 36.26,24.96 39.43,24.96 40.77,26.29 v1(42.42,26.29) 42.42,25.78 41.27,24.64 41.27,20.65 37.34,16.72 v1(37.34,16.38) 37.85,16.38 38.99,17.53 55.24,17.53 61.52,11.25 61.52,10.8 62.19,10.13 62.64,10.13 v1(63.88,8.89) ; v1(14.35,8.89) 12.83,10.41 12.83,13.84 14.22,15.24 14.22,17.46 12.57,19.11 12.57,19.94 v1(9.65,22.86) 12.57,25.78 12.57,36.8 15.24,39.47 v1(15.24,40.01) ; v1(62.1,30.48) 62.74,31.11 62.74,39.24 63.12,39.62 63.5,39.62 v1(63.88,40.01) 63.63,40.26 62.48,40.26 61.47,39.24 61.47,38.48 50.8,27.81
N14002690: length 1.9
  TOP w0.127: C12.1 31.87,24.42 U8.2
N14009218: length 2.1
  TOP w0.127: C7.1 21.96,18.14 U5.10
N14013380: length 2.4
  TOP w0.127: U6.6 32.3,15.03 32.13,14.86 31.5,14.86 31.33,15.03 U6.5
N14046481: length 3.4
  TOP w0.127: R40.2 42.25,14.77 42.25,14.78 R37.1 41.53,15.37 41.41,15.5 U7.1
N14046877: length 1.6
  TOP w0.127: U2.5 31.45,32.2 31.58,32.07 31.88,32.07 32,32.2 U2.4
N14048054: length 2.4
  TOP w0.127: C2.2 34.54,34.04 34.16,33.66 U2.1
N14098075: length 5.1
  TOP w0.127: H6.8 30.48,48.77 31.75,47.5 R19.1
N14098079: length 4.8
  TOP w0.127: R20.1 33.66,50.16 H6.7
N14098086: length 4.5
  TOP w0.127: R21.1 H6.6
N14098098: length 4.5
  TOP w0.127: R22.1 H6.5
N14098110: length 4.5
  TOP w0.127: R23.1 H6.4
N14098122: length 4.5
  TOP w0.127: R24.1 H6.3
N14098134: length 4.5
  TOP w0.127: R25.1 H6.2
N14098146: length 4.5
  TOP w0.127: R26.1 H6.1
N14098493: length 5.3
  TOP w0.127: R27.1 H5.1
N14098497: length 5.3
  TOP w0.127: R28.1 H5.2
N14098504: length 5.3
  TOP w0.127: R29.1 H5.3
N14098516: length 5.3
  TOP w0.127: R30.1 H5.4
N14098528: length 5.6
  TOP w0.127: H5.5 45.72,4.11 44.96,4.87 R31.1
N14105342: length 2.1
  TOP w0.127: U11.15 38.53,27.1 38.11,26.68 C19.1
N14105886: length 2.1
  TOP w0.127: C22.2 41.01,24.37 41.37,24.74 U11.5
N14107068: length 3.6
  TOP w0.127: R34.2 R41.2 42.58,27.14 42.55,27.1 U11.7
N14122965: length 7.8
  TOP w0.127: R39.2 22.23,47.75 22.61,48.13 22.61,52.07 H8.3
N14126545: length 3.5
  TOP w0.127: R35.1 26.84,9.02 26.8,9.07 U12.5
N14207646: length 1.7
  TOP w0.127: U17.3 10.95,17.21 C34.2
N14208918: length 6.6
  TOP w0.127: U17.7 7.47,16.76 7.26,16.97 7.26,18.44 7.4,18.58 R46.2 7.4,21.55 6.98,21.98 U18.4
N14209514: length 7.5
  TOP w0.127: U17.8 7.23,16.31 5.11,18.44 5.11,21.29 5.3,21.48 U18.5
N14210198: length 4
  TOP w0.127: R44.1 6.01,14.3 R45.2 8.1,15.49 8.28,15.68 U17.9
N14210289: length 6.7
  TOP w0.127: U17.5 8.28,18.32 8.72,18.76 R43.2 8.72,20.1 7.87,20.95 7.87,21.72 7.11,22.48 U18.3
N14216212: length 8.5
  TOP w0.229: C36.1 12.06,23.62 11.92,23.48 U18.10 ; C38.2 12.19,22.61 11.82,22.98 U18.9
  TOP w0.381: R42.1 12.19,25.4 12.92,24.68 C36.1 C38.2
N14227165: length 7.1
  TOP w0.127: H7.1 26.42,49.4 27.94,47.88 R18.1 R10.1
N14227297: length 7.7
  TOP w0.127: R11.1 R9.1 3.56,49.7 H7.10
N14227301: length 9.1
  TOP w0.127: R12.1 R8.1 10.79,47.24 8.62,49.42 7.47,49.42 H7.9
N14227313: length 4.6
  TOP w0.127: R14.1 16.51,50.55 H7.5
N14227321: length 4.7
  TOP w0.127: H7.4 18.8,48.39 18.41,48.01 R15.1
N14227333: length 5
  TOP w0.127: H7.3 20.32,49.78 R16.1
N14227345: length 4.6
  TOP w0.127: R17.1 24.13,47.88 23.88,48.13 H7.2
N14227481: length 4.9
  TOP w0.127: H7.6 14.61,49.91 R13.1
N141214550: length 8
  TOP w0.127: R33.2 26.04,47.24 25.15,48.13 25.15,52.07 H8.1
N142279790: length 1.5
  TOP w0.127: R36.1 D1.C

## Copper pours and planes (outline as drawn; the poured copper is in the pictures)
1.8V on BOTTOM: 8.26,14.61 12.32,14.61 13.59,15.88 13.59,17.53 11.3,19.81 7.75,19.81 6.1,18.16 6.1,16.76
GND on TOP: 0.51,55.37 70.61,55.37 70.61,0.51 0.51,0.51 ; 19 cut-outs
GND on BOTTOM: 0.51,55.37 70.61,55.37 70.61,0.51 0.51,0.51 ; 4 cut-outs
VDD on BOTTOM: 10.54,1.4 3.17,8.76 3.17,33.27 4.57,34.67 4.57,42.55 5.71,43.69 5.71,46.99 6.48,47.75 11.3,47.75 12.7,49.15 28.07,49.15 28.45,49.53 28.45,50.8 30.73,53.09 48.51,53.09 49.4,53.98 52.32,53.98 52.32,51.31 54.74,48.9 59.31,48.9 64.52,43.69 64.52,40.89 64.26,40.64 62.48,40.64 61.21,39.37 61.21,38.48 54.1,31.37 49.78,31.37 49.78,35.56 52.2,37.97 52.2,43.31 49.15,46.35 39.27,46.35 37.49,44.58 34.04,44.58 33.91,44.45 33.91,43.05 34.8,42.16 34.8,38.35 41.53,31.62 41.53,29.46 41.78,29.21 42.67,29.21 43.05,28.83 43.05,27.05 42.42,26.42 41.27,26.42 40.39,25.53 40.39,21.21 36.47,17.3 36.47,16.48 37.08,15.88 37.47,15.88 38.73,17.14 55.12,17.14 60.83,11.43 61.85,11.43 62.36,10.92 62.36,7.62 62.99,7.62 62.99,10.54 65.02,10.54 65.41,10.16 65.41,6.35 62.87,3.81 62.87,2.03 59.31,2.03 59.31,4.06 58.67,4.7 23.37,4.7 21.59,2.92 21.59,1.78 21.21,1.4 ; 2 cut-outs

## Text on the board
Ref Des/Silkscreen Bottom: 10
Ref Des/Silkscreen Top: CORNER ACCEL | TEMPERATURE | UV | ALS/PROX | PRESSURE | COLOR | GYRO | HALL | ACCEL+MAG MEM | PN: ROHM_SENSORSHLD1-EVK-101 | Designed in CA. c 2016 | Pb
LOGO_OUTLINE_M: SHEET:
User.7: 2 OF 2 | ASSEMBLY | SECONDARY-SIDE
User.9: 14. Rounding is allowed on 90 degree corners with the size of | 12. Inside corners should be rounded-off | 13. Changes to board geometries and apertures are not | 10. Bow and Twist | 11. Inspection | standard routing bit. | allowed unless they are approved by customer. | 4. Drilling | 5. Finish | 9. Packaging | 8. Cleanliness | 7. Electrical Test | 3. Soldermask | photoimageable soldermask, 003 max. thickness. | Soldermask over bare copper. | Soldermask is allowed in via holes. | Bow and twist to be .007 IN/IN or .090 max according to IPC-A-600D. | NOTES: | 2. Material | 6. Silkscreen | to conduct a thorough review of the artwork and media for | writing (in advance of manufacturing) of any changes, revisions,or | 1. Specifications. | as meaxured by the omega meter 600SMD. | A. All hole diameters are finished sizes. | B. All hole to be +/- .003 from true position unless otherwise specified. | C. All hole diameters to be +/- .003 unless otherwise specified. | D. An NC drill file has been supplied - see drill table. | A. Plate thru with copper .0010 min to .002 max. thickness drill size | dimension apply after plating. | B. Use gold immersion over nickel. | C. Finished boards shall not have nicks, | scratches, voids, exposed copper, poor plating, all misdrilled holes. | manufacturability in the supplier's process compliance to all | A. Boards shall be free of fiber glass dust or any other foreign material. | B. Finished boards must conform to 0.01 MG/IN max NAcL ionic contamination | A. All boards shall be 100% electrically tested for opens/short at 10 volts. | MIL-SPEC boards to be tested at 40 volts. | B. Apply test stamp in non-legend area on solder side of PCB. | C. Test is required on both sides of the board. | Solder mask both sides with (green color) liquid | A. FR4. | B. Color to be opaque. | A. Silkscreen using white non-conductive epoxy or equivalent (both sides). | B. No silkscreen allowed on exposed lands. | C. Silkscreen must be a minimum of 3mm away form fiducial marks. | D. Minimum clearance between silkscreen legend and vias, pads, or holes | to be .005. | E. Silkscreen is allowed in via holes. | There shall be a max of 25 units per package, individually wrapped, | and shipped in cardboard cratons with sufficient surrounding | material to prevend shipping damage. | A.Automatic optical inspection of all layers required. | B.The impedance should be controlled by stackup layer. | gerber and drill data when applicable. | A. Fabricate IAW  IPC600, latest revision. | B. Producibility study - It is the respondsibility  of the supplier | corrections made or recommendations to ensure conformance to | D. This drawing is to be used in conjunction with the provided | E. All notes are "Unless Otherwise Specified." | standards, and of  any specifications that  cannot be met. | applicable specifications. Customer must be advised in
User.11: 6 | 5 | 16 | 9 | 17 | 8 | 1 | 24 | 32 | 2 | 4 | 3 | LED7 | LED0 | 25
User.33: LAYER STACKING DETAIL | Total Overal Thickness: | Material Ordering Info (used in lieu of Fasttrak data) | Panel Size | Number Up | Number of Parts Due | Prepregs Construction Added? | Material Ply Specified | Material Type (ie Nelco-29, 370 HR, ...) | Layer # | Plating | 1 | 2 | Layer | Type | SIG | Copper | Weight | (Oz) | 0.5 | Thickness | (Mils) | 62.00+/-10% | 1.35 | 0.65 | Material | Type - Ply | Prepreg | Mils | Dielectric | ______ | FR4 | 58.00
User.36: FIGURE | SIZE | 12.0 | 40.0 | 125.0 | DRILL CHART: TOP to BOTTOM | ALL UNITS ARE IN MILS | TOLERANCE | +3.0/-10.0 | +3.0/-3.0 | PLATED | QTY | 264 | 54 | 4
